# EAGLE board KSP8_Power_Supply_Board_v81 (EAGLE 9.7.0)
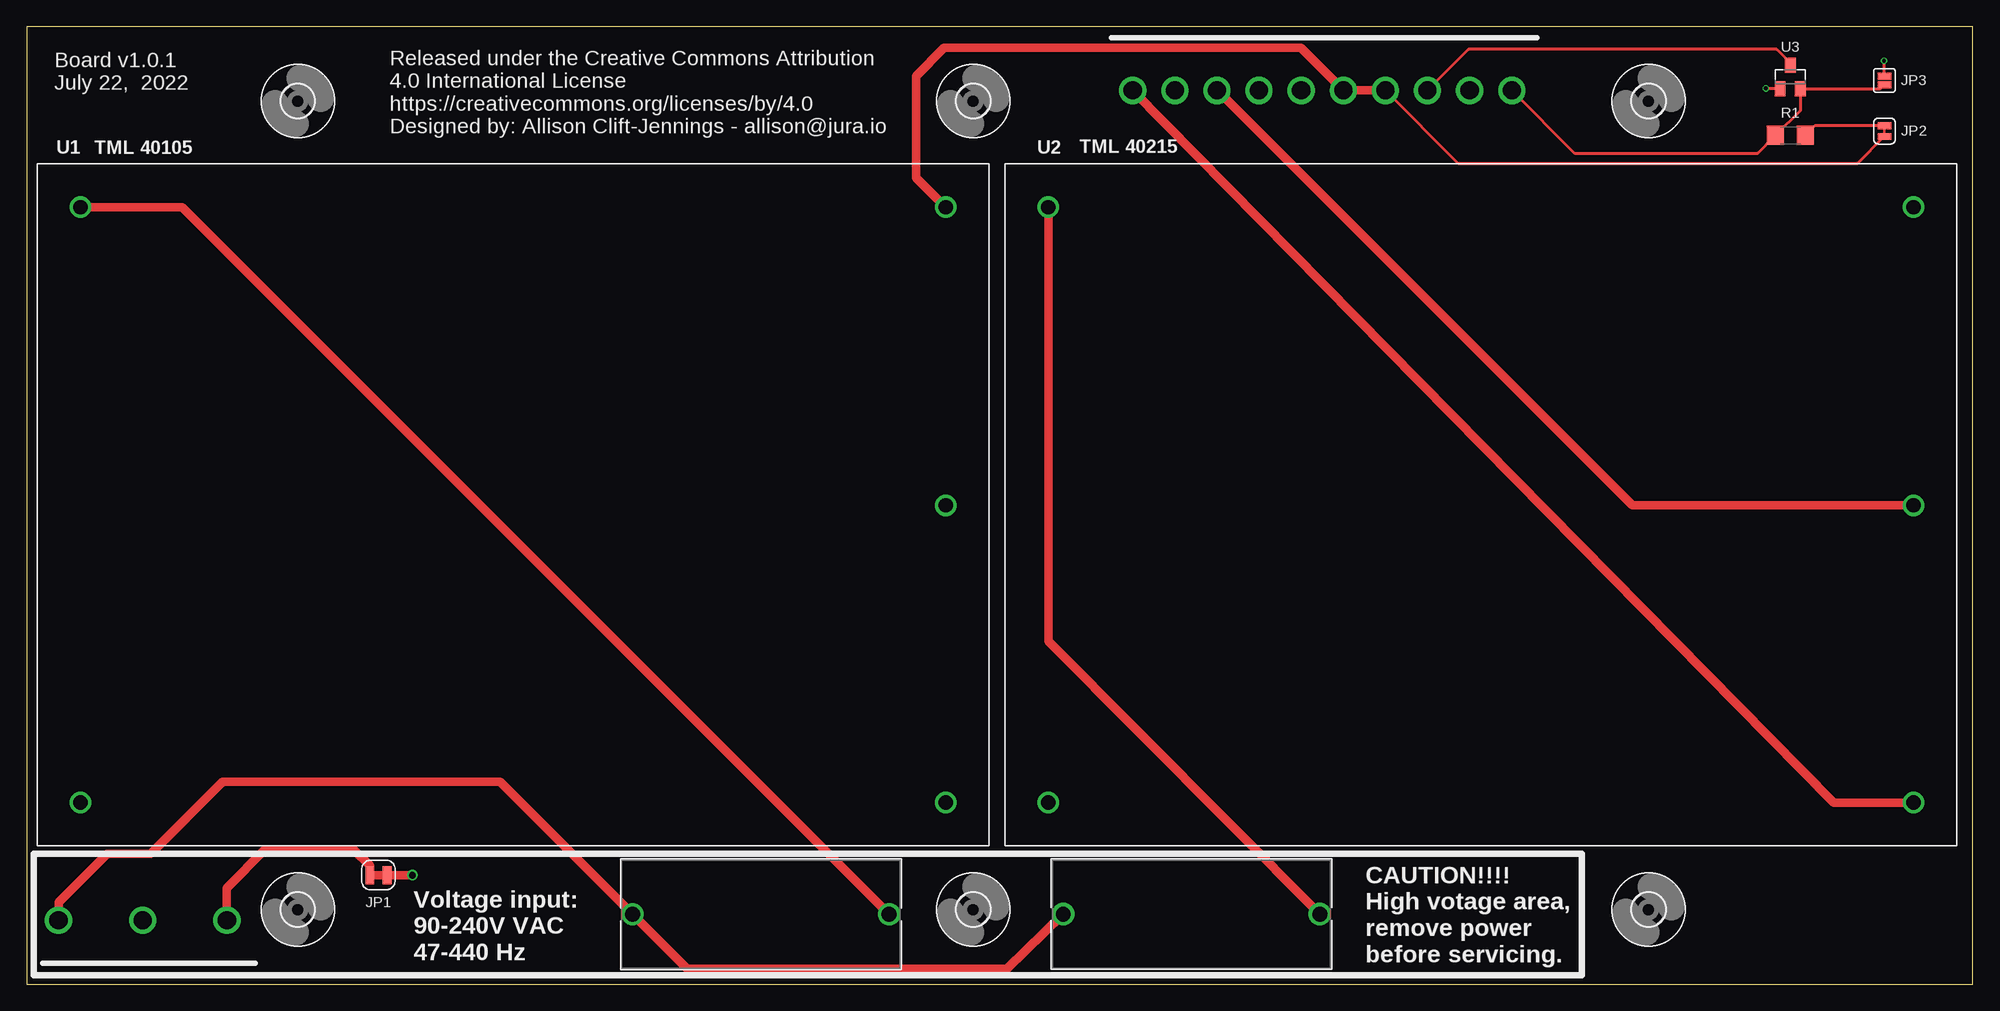
[diagram p0: board, top side]
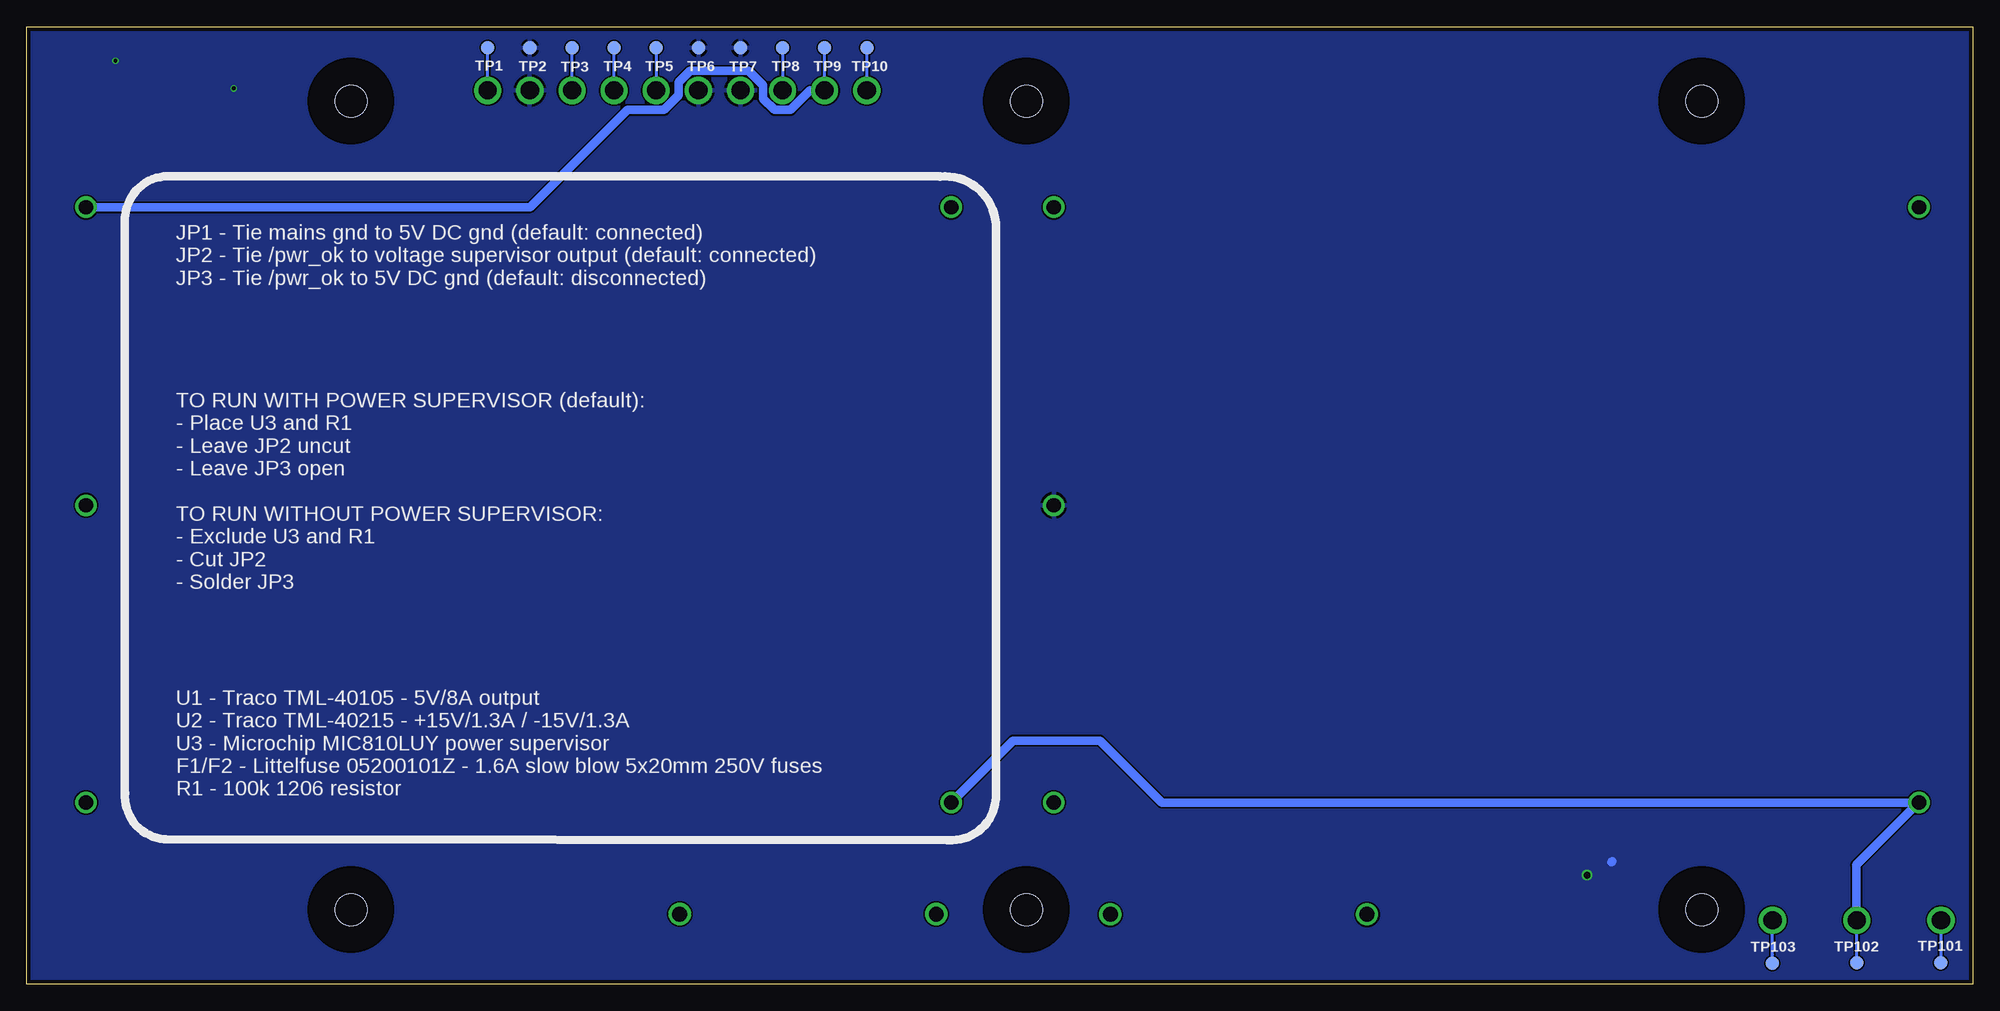
[diagram p1: board, bottom side, seen from below]

Size 183 x 90 mm. Coordinates in mm from the lower left corner, seen from the top.
Outline: 0,0 183,0 183,90 0,90 0,0
Copper layers (1*16): Top 0.035559375mm / dielectric 1.6mm / Bottom 0.035559375mm
Design rules "oshpark-2layer": minimum track width 6mil, minimum drill 10mil, track to track 6mil, track to pad 6mil, pad to pad 6mil, via to via 6mil, smd to smd 6mil, copper to edge 15mil, drill to drill 6mil, minimum pad ring 5mil, minimum via ring 5mil, stop-mask expansion 2.5mil, vias tented up to drill 0mil, thermal gap 10mil

## Footprints (pad centres in the part's own frame; a part is rotated, then mirrored left to right if it is on the bottom)
PAD-067-LOOP = drill 1.702: P$1 0,0
LITTELFUSE_05200101Z_LTF = drill 1.397 pad 1.905: 1 0,0; 2 24.13,0
3,0 = hole 3: 0,0
SMT-JUMPER_2_NC_TRACE_SILK_HC = smd 0.813 x 1.676: 1 -0.813,0.025; 2 0.813,0.025
SMT-JUMPER_2_NC_TRACE_SILK = smd 0.635 x 1.27: 1 -0.508,0; 2 0.508,0
SMT-JUMPER_2_NO_SILK = smd 0.635 x 1.27: 1 -0.406,0; 2 0.406,0
1206 = smd 1.6 x 1.8: 1 -1.4,0; 2 1.4,0
PAD-100-RND = smd 1.27 x 1.27: P$1 0,0
TRACO_TML = drill 1.346: P$2 4.064,60.02; P$3 4.064,4.064; P$4 85.42,60.02; P$6 85.42,32.004; P$8 85.42,4.064
SOT23 = smd 1 x 1.4: 1 -0.95,-1.1; 2 0.95,-1.1; 3 0,1.1

## Placement (x,y rotation side)
AGND  PADPAD-070-LOOP  [PAD-067-LOOP]  111.92,84 0 top
F1  LITTELFUSE_05200101ZFUSE_05200101Z_LTF  [LITTELFUSE_05200101Z_LTF]  56.97,6.56 0 top
F2  LITTELFUSE_05200101ZFUSE_05200101Z_LTF  [LITTELFUSE_05200101Z_LTF]  97.46,6.58 0 top
FRAME1  FRAME-LETTER-OS  [CREATIVE_COMMONS]  69,-11.16 0 top  (outside the outline)
H1  MOUNT-HOLE3.0  [3,0]  25.5,7 0 top
H2  MOUNT-HOLE3.0  [3,0]  152.5,7 0 top
H3  MOUNT-HOLE3.0  [3,0]  25.5,83 0 top
H4  MOUNT-HOLE3.0  [3,0]  152.5,83 0 top
H5  MOUNT-HOLE3.0  [3,0]  89,7 0 top
H6  MOUNT-HOLE3.0  [3,0]  89,83 0 top
JP1  JUMPER-SMT_2_NO_SILK  [SMT-JUMPER_2_NC_TRACE_SILK_HC]  33.09,10.21 0 top
JP2  JUMPER-SMT_2_NC_TRACE_SILK  [SMT-JUMPER_2_NC_TRACE_SILK]  174.69,80.18 270 top
JP3  JUMPER-SMT_2_NO_SILK  [SMT-JUMPER_2_NO_SILK]  174.68,84.94 270 top
R1  100k  [1206]  165.84,79.78 0 top
TP1  TESTPOINT  [PAD-100-RND]  139.64,88 0 bottom
TP2  TESTPOINT  [PAD-100-RND]  135.68,88 0 bottom
TP3  TESTPOINT  [PAD-100-RND]  131.72,88 0 bottom
TP4  TESTPOINT  [PAD-100-RND]  127.76,88 0 bottom
TP5  TESTPOINT  [PAD-100-RND]  123.8,88 0 bottom
TP6  TESTPOINT  [PAD-100-RND]  119.84,88 0 bottom
TP7  TESTPOINT  [PAD-100-RND]  115.88,88 0 bottom
TP8  TESTPOINT  [PAD-100-RND]  111.92,88 0 bottom
TP9  TESTPOINT  [PAD-100-RND]  107.96,88 0 bottom
TP10  TESTPOINT  [PAD-100-RND]  104,88 0 bottom
TP101  TESTPOINT  [PAD-100-RND]  3,2 180 bottom
TP102  TESTPOINT  [PAD-100-RND]  10.9,2 180 bottom
TP103  TESTPOINT  [PAD-100-RND]  18.87,1.97 180 bottom
U1  TML 40105  [TRACO_TML]  1,13 0 top
U2  TML 40215  [TRACO_TML]  92,13 0 top
U3  MIC810LUY  [SOT23]  165.82,85.27 0 top
U$4  PADPAD-070-LOOP  [PAD-067-LOOP]  3,6 180 top
U$5  PADPAD-070-LOOP  [PAD-067-LOOP]  10.92,6 180 top
U$6  PADPAD-070-LOOP  [PAD-067-LOOP]  107.96,84 0 top
U$7  PADPAD-070-LOOP  [PAD-067-LOOP]  104,84 0 top
U$8  PADPAD-070-LOOP  [PAD-067-LOOP]  139.64,84 0 top
U$9  PADPAD-070-LOOP  [PAD-067-LOOP]  127.76,84 0 top
U$10  PADPAD-070-LOOP  [PAD-067-LOOP]  135.68,84 0 top
U$11  PADPAD-070-LOOP  [PAD-067-LOOP]  18.84,6 180 top
U$12  PADPAD-070-LOOP  [PAD-067-LOOP]  131.72,84 0 top
U$13  PADPAD-070-LOOP  [PAD-067-LOOP]  119.84,84 0 top
U$14  PADPAD-070-LOOP  [PAD-067-LOOP]  115.88,84 0 top
U$15  PADPAD-070-LOOP  [PAD-067-LOOP]  123.8,84 0 top

## Library data of the parts
AGND FRAME1 H1-H6 JP1-JP3 R1 TP1-TP10 TP101-TP103 U1-U3 U$4-U$15 = Tonic Library
F1 F2 = Tonic Library; COPYRIGHT: Copyright (C) 2022 Ultra Librarian. All rights reserved.; MANUFACTURER_PART_NUMBER: 05200101Z; MFR_NAME: Littelfuse Inc

## Nets
!PWR_OK: JP3.2 R1.1 TP1.P$1 U3.2 U$8.P$1
+15V: TP9.P$1 U2.P$4 U$6.P$1
-15V: TP10.P$1 U2.P$8 U$7.P$1
AC_GND: JP1.1 TP103.P$1 U$11.P$1
AC_L: F1.1 F2.1 TP101.P$1 U$4.P$1
AC_N: TP102.P$1 U1.P$3 U2.P$3 U$5.P$1
AGND: AGND.P$1 TP8.P$1 U2.P$6
DGND: JP1.2 JP3.1 TP2.P$1 TP6.P$1 TP7.P$1 U1.P$6 U3.1 U$10.P$1 U$13.P$1 U$14.P$1
N$1: F1.2 U1.P$2
N$2: F2.2 U2.P$2
N$4: JP2.1 R1.2
VCC: JP2.2 TP4.P$1 TP5.P$1 U1.P$4 U$9.P$1 U$15.P$1
VCC_SNS: TP3.P$1 U3.3 U$12.P$1

## Tracks (layer width: path | path; a pad name or v marks a point on that pad's centre or on a via)
!PWR_OK
  Top 0.305: JP3.2 174.31,84.17 U3.2 166.78,82.11 R1.1 162.72,78.05 145.59,78.05 U$8.P$1
  Bottom 0.305: U$8.P$1 TP1.P$1
+15V
  Bottom 0.305: U$6.P$1 TP9.P$1
  Bottom 0.813: U2.P$4 135.65,73.02 126.5,82.17 123.04,82.17 121.67,83.53 121.67,84.76 120.6,85.83 115.12,85.83 113.75,84.47 113.75,83.24 112.68,82.17 111.16,82.17 109.33,84 U$6.P$1
-15V
  Top 0.813: U2.P$8 169.94,17.06 U$7.P$1
  Bottom 0.305: U$7.P$1 TP10.P$1
AC_GND
  Top 0.305: JP1.1 32.28,11.09 32.28,11.1
  Top 0.813: U$11.P$1 18.82,6.02 18.82,9.02 22.45,12.65 30.73,12.65 32.28,11.1
  Bottom 0.305: TP103.P$1 18.84,2.8 U$11.P$1
AC_L
  Top 0.813: F2.1 92.19,1.45 62.08,1.45 F1.1 44.53,19 18.42,19 11.68,12.26 7.58,12.26 3,7.68 U$4.P$1
  Bottom 0.305: U$4.P$1 TP101.P$1
AC_N
  Bottom 0.305: U$5.P$1 10.92,2 TP102.P$1
  Bottom 0.813: U2.P$3 90.24,22.89 82.09,22.89 76.27,17.06 U1.P$3 5.12,17.06 10.97,11.21 10.97,6.05 U$5.P$1
AGND
  Top 0.813: U2.P$6 151.56,45 151,45 150.98,45 111.98,84 AGND.P$1
  Bottom 0.305: TP8.P$1 AGND.P$1
DGND  (via drill 0.35, 0.65)
  Top 0.305: JP3.1 174.68,86.77 v174.65,86.79 | U3.1 163.56,84.17 v163.53,84.2 | JP1.2 34.38,10.24
  Top 0.813: v36.27,10.24 34.39,10.24 34.38,10.24
  Bottom 0.813: 33.91,11.56 34.01,11.46
  pour Bottom: 0.2,0.2 182.8,0.2 182.8,89.8 0.2,89.8
N$1
  Top 0.813: F1.2 14.64,73.02 U1.P$2
N$2
  Top 0.813: U2.P$2 96.06,32.22 F2.2
N$4
  Top 0.305: JP2.1 168.15,80.69 R1.2
VCC
  Top 0.305: JP2.2 172.13,77.11 134.65,77.11 U$9.P$1
  Top 0.813: U$9.P$1 U$15.P$1 123.8,84.02 119.82,88 86.28,88 83.63,85.35 83.63,75.81 U1.P$4
  Bottom 0.305: TP5.P$1 U$15.P$1 | U$9.P$1 TP4.P$1
VCC_SNS
  Top 0.305: U3.3 165.82,86.59 164.55,87.86 135.58,87.86 U$12.P$1
  Bottom 0.305: U$12.P$1 TP3.P$1

## Text on the board
tPlace: Board v1.0.1 / July 22, 2022 | Released under the Creative Commons Attribution / 4.0 International License / https://creativecommons.org/licenses/by/4.0 / Designed by: Allison Clift-Jennings - allison@jura.io | Voltage input: / 90-240V VAC / 47-440 Hz | CAUTION!!!! / High votage area, / remove power / before servicing.
bPlace: JP1 - Tie mains gnd to 5V DC gnd (default: connected) / JP2 - Tie /pwr_ok to voltage supervisor output (default: connected) / JP3 - Tie /pwr_ok to 5V DC gnd (default: disconnected) | TO RUN WITH POWER SUPERVISOR (default): / - Place U3 and R1 / - Leave JP2 uncut / - Leave JP3 open / / TO RUN WITHOUT POWER SUPERVISOR: / - Exclude U3 and R1 / - Cut JP2 / - Solder JP3 | U1 - Traco TML-40105 - 5V/8A output / U2 - Traco TML-40215 - +15V/1.3A / -15V/1.3A / U3 - Microchip MIC810LUY power supervisor / F1/F2 - Littelfuse 05200101Z - 1.6A slow blow 5x20mm 250V fuses / R1 - 100k 1206 resistor